# EAGLE board targetboard.job (EAGLE 6.5.0)
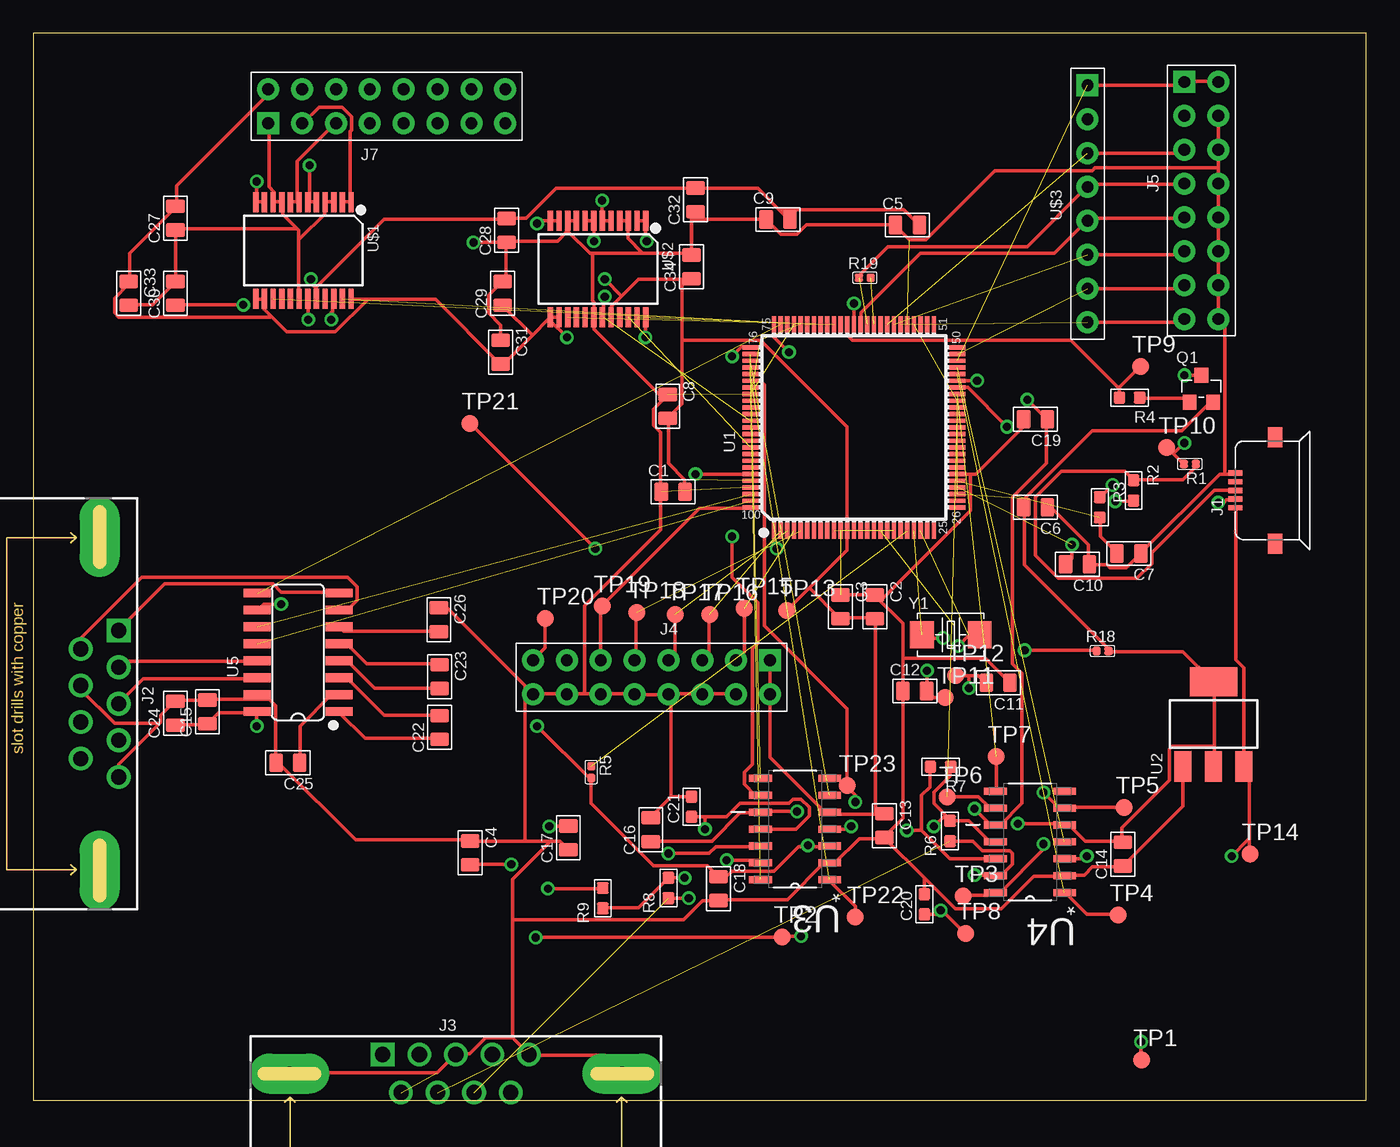
[diagram p0: board, top side]
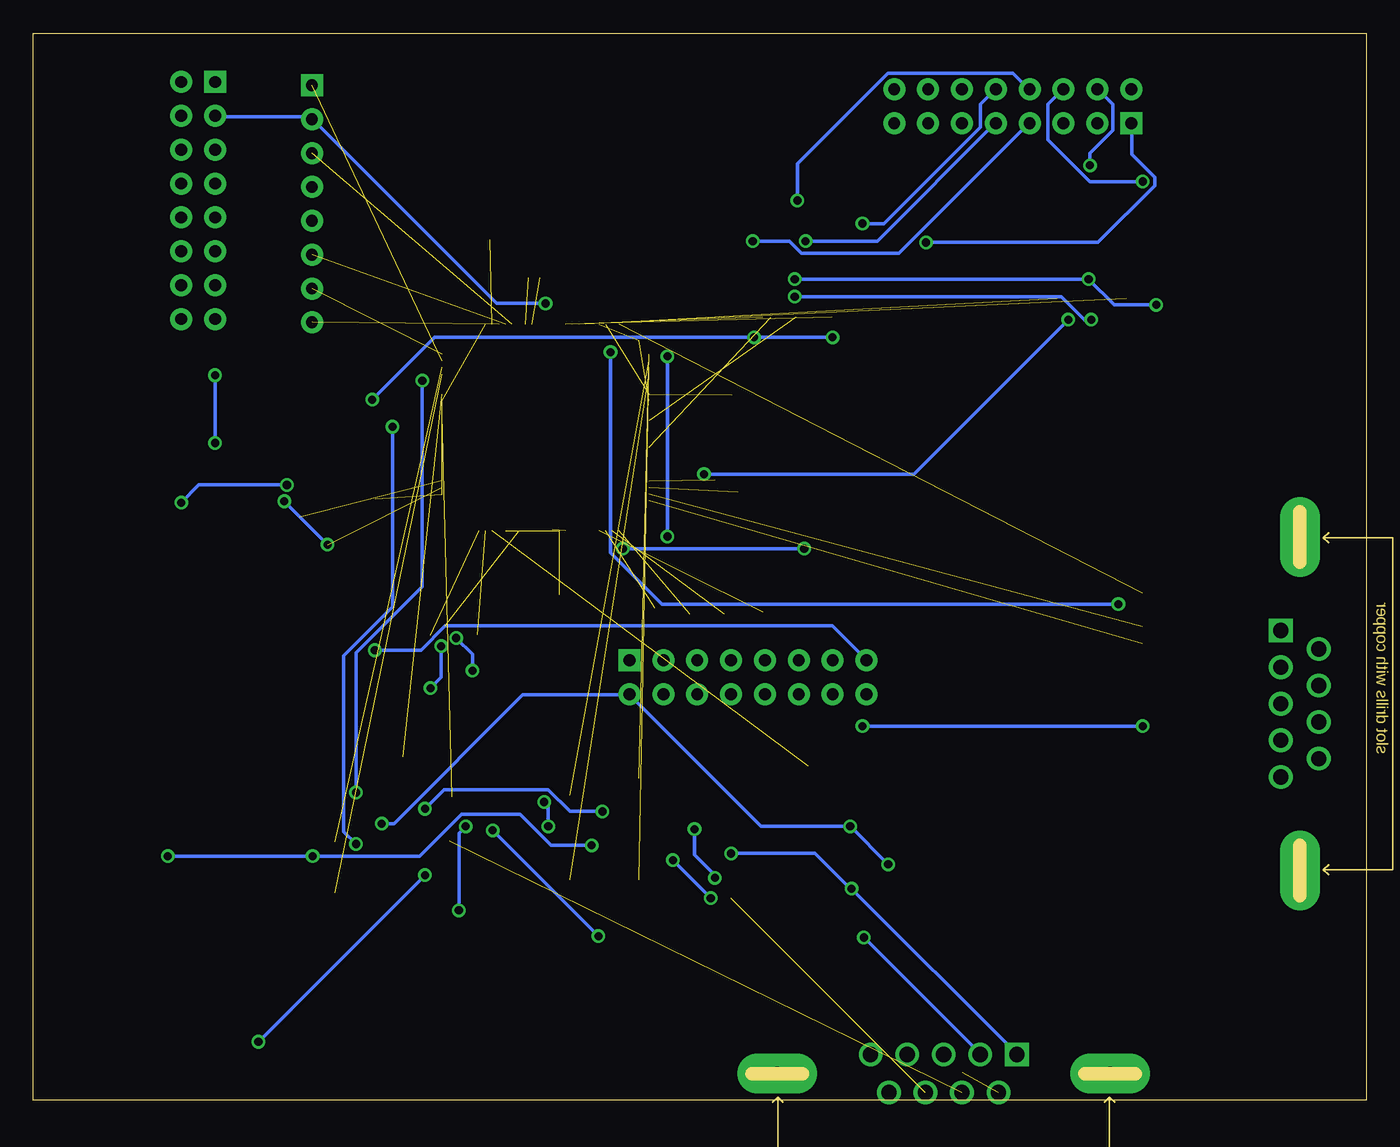
[diagram p1: board, bottom side, seen from below]

Size 100 x 80 mm. Coordinates in mm from the lower left corner, seen from the top.
Outline: 0,0 100,0 100,80 0,80 0,0
Copper layers (1*16): Top 0.035mm / dielectric 1.5mm / Bottom 0.035mm
Design rules "default": minimum track width 10mil, minimum drill 24mil, track to track 8mil, track to pad 8mil, pad to pad 8mil, via to via 8mil, smd to smd 8mil, copper to edge 40mil, drill to drill 8mil, minimum pad ring 10mil, minimum via ring 8mil, stop-mask expansion 4mil, vias tented up to drill 0mil, thermal gap 10mil

## Footprints (pad centres in the part's own frame; a part is rotated, then mirrored left to right if it is on the bottom)
C0805 = smd 1.397 x 1.016: 1 0,0.889; 2 0,-0.889
C0603 = smd 0.889 x 0.889: 1 0,0.762; 2 0,-0.762
MICRO-USB5+2P-SMD-0.65 = smd 0.4 x 1.05: 1 -1.3,0; 2 -0.65,0; 3 0,0; 4 0.65,0; 5 1.3,0 | smd 1.5 x 1.1: 6 4,-3; 7 -4,-3
DSUB9+2P-2.77-90D-MALE = drill 1.143 pad 1.778 square: 1 -5.486,1.422 | drill 1.143 pad 1.778: 2 -2.743,1.422; 3 0,1.422; 4 2.743,1.422; 5 5.486,1.422; 6 -4.115,-1.422; 7 -1.372,-1.422; 8 1.372,-1.422; 9 4.115,-1.422 | drill 1 pad 3 long: G1 12.497,0; G2 -12.497,0
H2X8-2.54 = drill 0.889 pad 1.651 square: 1 -1.27,8.89 | drill 0.889 pad 1.651: 2 -1.27,6.35; 3 -1.27,3.81; 4 -1.27,1.27; 5 -1.27,-1.27; 6 -1.27,-3.81; 7 -1.27,-6.35; 8 -1.27,-8.89; 9 1.27,-8.89; 10 1.27,-6.35; 11 1.27,-3.81; 12 1.27,-1.27; 13 1.27,1.27; 14 1.27,3.81; 15 1.27,6.35; 16 1.27,8.89
SOT-23 = smd 1.016 x 1.143: 1 -0.889,-1.016; 2 0.889,-1.016; 3 0,1.016
R0402 = smd 0.635 x 0.635: 1 0,0.445; 2 0,-0.445
R0603 = smd 0.889 x 0.889: 1 0,0.762; 2 0,-0.762
B1,27 = smd 1.27 x 1.27: TP 0,0
LQFP100-0.5-13.8X13.8MM = smd 1.2 x 0.32: 1 -7.75,6; 2 -7.75,5.5; 3 -7.75,5; 4 -7.75,4.5; 5 -7.75,4; 6 -7.75,3.5; 7 -7.75,3; 8 -7.75,2.5; 9 -7.75,2; 10 -7.75,1.5; 11 -7.75,1; 12 -7.75,0.5; 13 -7.75,0; 14 -7.75,-0.5; 15 -7.75,-1; 16 -7.75,-1.5; 17 -7.75,-2; 18 -7.75,-2.5; 19 -7.75,-3; 20 -7.75,-3.5; 21 -7.75,-4; 22 -7.75,-4.5; 23 -7.75,-5; 24 -7.75,-5.5; 25 -7.75,-6; 51 7.75,-6; 52 7.75,-5.5; 53 7.75,-5; 54 7.75,-4.5; 55 7.75,-4; 56 7.75,-3.5; 57 7.75,-3; 58 7.75,-2.5; 59 7.75,-2; 60 7.75,-1.5; 61 7.75,-1; 62 7.75,-0.5; 63 7.75,0; 64 7.75,0.5; 65 7.75,1; 66 7.75,1.5; 67 7.75,2; 68 7.75,2.5; 69 7.75,3; 70 7.75,3.5; 71 7.75,4; 72 7.75,4.5; 73 7.75,5; 74 7.75,5.5; 75 7.75,6 | smd 0.32 x 1.2: 26 -6,-7.75; 27 -5.5,-7.75; 28 -5,-7.75; 29 -4.5,-7.75; 30 -4,-7.75; 31 -3.5,-7.75; 32 -3,-7.75; 33 -2.5,-7.75; 34 -2,-7.75; 35 -1.5,-7.75; 36 -1,-7.75; 37 -0.5,-7.75; 38 0,-7.75; 39 0.5,-7.75; 40 1,-7.75; 41 1.5,-7.75; 42 2,-7.75; 43 2.5,-7.75; 44 3,-7.75; 45 3.5,-7.75; 46 4,-7.75; 47 4.5,-7.75; 48 5,-7.75; 49 5.5,-7.75; 50 6,-7.75; 76 6,7.75; 77 5.5,7.75; 78 5,7.75; 79 4.5,7.75; 80 4,7.75; 81 3.5,7.75; 82 3,7.75; 83 2.5,7.75; 84 2,7.75; 85 1.5,7.75; 86 1,7.75; 87 0.5,7.75; 88 0,7.75; 89 -0.5,7.75; 90 -1,7.75; 91 -1.5,7.75; 92 -2,7.75; 93 -2.5,7.75; 94 -3,7.75; 95 -3.5,7.75; 96 -4,7.75; 97 -4.5,7.75; 98 -5,7.75; 99 -5.5,7.75; 100 -6,7.75
SOT-223 = smd 1.27 x 2.286: 1 -2.286,-3.175; 2 0,-3.175; 3 2.286,-3.175 | smd 3.556 x 2.159: TER 0,3.175
SOIC127P600X175-14N = smd 1.702 x 0.533: 1 -2.591,3.81; 2 -2.591,2.54; 3 -2.591,1.27; 4 -2.591,0; 5 -2.591,-1.27; 6 -2.591,-2.54; 7 -2.591,-3.81; 8 2.591,-3.81; 9 2.591,-2.54; 10 2.591,-1.27; 11 2.591,0; 12 2.591,1.27; 13 2.591,2.54; 14 2.591,3.81
SOIC16-1.27-10X3.9MM = smd 0.66 x 2.032: 1 -4.445,-3.073; 2 -3.175,-3.073; 3 -1.905,-3.073; 4 -0.635,-3.073; 5 0.635,-3.073; 6 1.905,-3.073; 7 3.175,-3.073; 8 4.445,-3.073; 9 4.445,3.073; 10 3.175,3.073; 11 1.905,3.073; 12 0.635,3.073; 13 -0.635,3.073; 14 -1.905,3.073; 15 -3.175,3.073; 16 -4.445,3.073
SSOP24-0.65-8.9X5.3MM = smd 0.4 x 1.5: 1 -3.575,-3.625; 2 -2.925,-3.625; 3 -2.275,-3.625; 4 -1.625,-3.625; 5 -0.975,-3.625; 6 -0.325,-3.625; 7 0.325,-3.625; 8 0.975,-3.625; 9 1.625,-3.625; 10 2.275,-3.625; 11 2.925,-3.625; 12 3.575,-3.625; 13 3.575,3.625; 14 2.925,3.625; 15 2.275,3.625; 16 1.625,3.625; 17 0.975,3.625; 18 0.325,3.625; 19 -0.325,3.625; 20 -0.975,3.625; 21 -1.625,3.625; 22 -2.275,3.625; 23 -2.925,3.625; 24 -3.575,3.625
H8-2.54 = drill 0.889 pad 1.651 square: 1 0,8.89 | drill 0.889 pad 1.651: 2 0,6.35; 3 0,3.81; 4 0,1.27; 5 0,-1.27; 6 0,-3.81; 7 0,-6.35; 8 0,-8.89
X2-SMD-5.0X3.2X1.3MM = smd 1.778 x 2.032: 1 -2.159,0; 2 2.159,0

## Placement (x,y rotation side)
C1  100nf  [C0805]  48.01,45.62 90 top
C2  100nf  [C0805]  63.14,36.98 0 top
C3  100nf  [C0805]  60.55,36.98 0 top
C4  100nf  [C0805]  32.77,18.54 0 top
C5  100nf  [C0805]  65.58,65.63 90 top
C6  100nf  [C0805]  75.18,44.45 270 top
C7  18pf  [C0805]  82.19,41 270 top
C8  100nf  [C0805]  47.6,52.02 0 top
C9  100nf  [C0805]  55.88,66.04 90 top
C10  18pf  [C0805]  78.33,40.18 270 top
C11  18pf  [C0805]  72.39,31.29 270 top
C12  18pf  [C0805]  66.14,30.68 90 top
C13  100nf  [C0805]  63.86,20.57 0 top
C14  100nf  [C0805]  81.74,18.44 180 top
C15  100nf  [C0805]  13.06,29.11 180 top
C16  100nf  [C0805]  46.33,20.27 180 top
C17  100nf  [C0805]  40.13,19.66 180 top
C18  100nf  [C0805]  51.41,15.85 0 top
C19  100nf  [C0805]  75.18,51.05 270 top
C20  22nf  [C0603]  66.85,14.68 180 top
C21  22nf  [C0603]  49.38,22 180 top
C22  1uf  [C0805]  30.48,27.94 180 top
C23  1uf  [C0805]  30.48,31.75 0 top
C24  1uf  [C0805]  10.67,29.01 180 top
C25  1uf  [C0805]  19.1,25.3 270 top
C26  1uf  [C0805]  30.43,36.02 0 top
C27  10uf  [C0805]  10.67,66.14 180 top
C28  10uf  [C0805]  35.51,65.23 180 top
C29  100nf  [C0805]  35.2,60.5 180 top
C30  100nf  [C0805]  10.67,60.5 180 top
C31  10uf  [C0805]  35.05,56.08 0 top
C32  10uf  [C0805]  49.68,67.51 180 top
C33  100nf  [C0805]  7.16,60.5 0 top
C34  100nf  [C0805]  49.38,62.48 180 top
J1  [MICRO-USB5+2P-SMD-0.65]  90.17,45.72 90 top
J2  [DSUB9+2P-2.77-90D-MALE]  4.98,29.72 270 top
J3  [DSUB9+2P-2.77-90D-MALE]  31.7,1.98 0 top
J4  2x8p-2.54  [H2X8-2.54]  46.38,31.7 270 top
J5  2x8p-2.54  [H2X8-2.54]  87.63,67.46 0 top
J7  2x8p-2.54  [H2X8-2.54]  26.52,74.52 90 top
Q1  [SOT-23]  87.63,53.34 0 top
R1  1.5K  [R0402]  86.77,47.7 270 top
R2  33.2R  [R0603]  82.55,45.72 180 top
R3  33.2R  [R0603]  80.01,44.45 180 top
R4  51R  [R0603]  82.25,52.68 90 top
R5  1.5K  [R0402]  41.86,24.59 0 top
R6  56.2R  [R0603]  68.78,20.17 0 top
R7  56.2R  [R0603]  68.07,24.99 90 top
R8  56.2R  [R0603]  47.65,15.9 0 top
R9  56.2R  [R0603]  42.72,15.14 0 top
R18  1.5K  [R0402]  80.21,33.68 90 top
R19  1.5K  [R0402]  62.38,61.67 90 top
TP1  TPB1,27  [B1,27]  83.16,3 0 top
TP2  TPB1,27  [B1,27]  56.18,12.24 0 top
TP3  TPB1,27  [B1,27]  69.75,15.29 0 top
TP4  TPB1,27  [B1,27]  81.38,13.87 0 top
TP5  TPB1,27  [B1,27]  81.84,21.95 0 top
TP6  TPB1,27  [B1,27]  68.58,22.71 0 top
TP7  TPB1,27  [B1,27]  72.24,25.76 0 top
TP8  TPB1,27  [B1,27]  69.95,12.5 0 top
TP9  TPB1,27  [B1,27]  83.06,55.02 0 top
TP10  TPB1,27  [B1,27]  85.04,48.92 0 top
TP11  TPB1,27  [B1,27]  68.43,30.18 0 top
TP12  TPB1,27  [B1,27]  69.19,31.85 0 top
TP13  TPB1,27  [B1,27]  56.54,36.73 0 top
TP14  TPB1,27  [B1,27]  91.29,18.44 0 top
TP15  TPB1,27  [B1,27]  53.34,36.88 0 top
TP16  TPB1,27  [B1,27]  50.75,36.42 0 top
TP17  TPB1,27  [B1,27]  48.16,36.42 0 top
TP18  TPB1,27  [B1,27]  45.26,36.58 0 top
TP19  TPB1,27  [B1,27]  42.67,37.03 0 top
TP20  TPB1,27  [B1,27]  38.4,36.12 0 top
TP21  TPB1,27  [B1,27]  32.77,50.75 0 top
TP22  TPB1,27  [B1,27]  61.67,13.72 0 top
TP23  TPB1,27  [B1,27]  61.06,23.57 0 top
U1  [LQFP100-0.5-13.8X13.8MM]  61.57,50.44 90 top
U2  PMIC-CJT1117-3.3(SOT223)  [SOT-223]  88.54,28.19 0 top
U3  TJA1041AT  [SOIC127P600X175-14N]  57.15,20.32 180 top
U4  TJA1041AT  [SOIC127P600X175-14N]  74.78,19.35 180 top
U5  [SOIC16-1.27-10X3.9MM]  19.86,33.58 90 top
U$1  [SSOP24-0.65-8.9X5.3MM]  20.27,63.7 180 top
U$2  [SSOP24-0.65-8.9X5.3MM]  42.37,62.33 180 top
U$3  DIP-BLACK-MALE-HEADER-VERT(8P-2.54)  [H8-2.54]  79.1,67.21 0 top
Y1  12MHZ  [X2-SMD-5.0X3.2X1.3MM]  68.83,34.9 0 top

## Library data of the parts
C1-C6 C8 C9 C13-C19 C29 C30 C33 C34 = Seeed-OPL-Capacitor; MPN: CC0805KRX7R9BB104
C7 C10-C12 = Seeed-OPL-Capacitor
C20 C21 = Seeed-OPL-Capacitor; MPN: CC0603KRX7R9BB223
C22-C26 = Seeed-OPL-Capacitor; MPN: CC0805KKX7R8BB105
C27 C28 C31 C32 = Seeed-OPL-Capacitor; MPN: CC0805KKX5R8BB106
J1 = Seeed-OPL-Connector; MPN: ST-USB-001L
J2 J3 = Seeed-OPL-Connector
J4 J5 J7 = Seeed-OPL-Connector; MPN: P125-1216A0AS116A1
Q1 = Seeed-OPL-Transistor; MPN: S8550
R1 R5 R18 R19 = Seeed-OPL-Resistor; MPN: RC0402JR-071K5L
R2 R3 = Seeed-OPL-Resistor; MPN: RC0603FR-0733R2L
R4 = Seeed-OPL-Resistor; MPN: RC0603FR-0751RL
R6-R9 = Seeed-OPL-Resistor; MPN: RC0603FR-0756R2L
TP1-TP23 = testpad
U1 = Seeed-OPL-ic; MPN: LPC1768FBD100
U2 = Seeed-OPL-ic; MPN: CJT1117-3.3
U3 U4 = NXP_By_element14_Batch_1; MPN: TJA1041AT; OC_FARNELL: 1727708; OC_NEWARK: 26R3027; PACKAGE: SOIC-14; SUPPLIER: NXP
U5 = Seeed-OPL-ic; MPN: MAX232D
U$1 U$2 = Seeed-OPL-ic; MPN: TB6612FNG-O/C8/EL
U$3 = Seeed-OPL-Connector; MPN: P125-1108A1BS116A1
Y1 = Seeed-OPL-crystal-osctllator; MPN: 5032/2P

## Nets
+12V: C16.1 C19.1 C27.2 C29.1 C31.2 C33.1 J7.16 U3.10 U4.10 U$1.13 U$1.14 U$1.24 U$2.13 U$2.14 U$2.24
CAN1_EN: TP5.TP U1.45 U4.6
CAN1_ERR: TP7.TP U1.43 U4.8
CAN1_H: J3.7 R6.2 TP1.TP U4.13
CAN1_L: J3.2 R7.1 TP2.TP U4.12
CAN1_RX: U1.47 U4.4
CAN1_STB: TP3.TP U1.44 U4.14
CAN1_TX: TP4.TP U1.46 U4.1
CAN1_WAKE: TP6.TP U1.40 U4.9
CAN2_EN: U1.78 U3.6
CAN2_ERR: U1.77 U3.8
CAN2_H: J3.8 R8.2 U3.13
CAN2_L: J3.1 R9.1 U3.12
CAN2_RX: TP23.TP U1.81 U3.4
CAN2_STB: U1.79 U3.14
CAN2_TX: TP22.TP U1.80 U3.1
CAN2_WAKE: U1.76 U3.9
CM1A: U1.95 U$1.22
CM1B: U1.94
CM2A: U1.93
CM2B: U1.92
CM3A: U1.91 U$2.22
CM3B: U1.90
CM4A: U1.89
CM4B: U1.88
GND: C1.1 C2.1 C3.1 C4.1 C5.1 C6.1 C7.1 C8.1 C9.1 C10.1 C11.1 C12.1 C13.2 C14.1 C15.2 C16.2 C17.1 C18.2 C19.2 C20.2 C21.2 C24.2 C25.2 C26.1 C27.1 C28.1 C29.2 C30.2 C31.1 C32.1 C33.2 C34.2 J1.5 J2.5 J2.7 J3.3 J3.5 J3.6 J3.G1 J3.G2 J4.9 J4.10 J4.11 J4.12 J4.13 J4.14 J4.15 J5.9 J5.10 J5.11 J5.12 J5.13 J5.14 J5.15 J7.1 U1.11 U1.15 U1.31 U1.41 U1.55 U1.72 U1.83 U1.97 U2.1 U3.2 U4.2 U5.15 U$1.3 U$1.4 U$1.9 U$1.10 U$1.18 U$2.3 U$2.4 U$2.9 U$2.10 U$2.18
M1A: J7.2 U$1.1 U$1.2
M1B: J7.15 U$1.5 U$1.6
M2A: J7.3 U$1.7 U$1.8
M2B: J7.14 U$1.11 U$1.12
M3A: J7.4 U$2.1 U$2.2
M3B: J7.13 U$2.5 U$2.6
M4A: J7.5 U$2.7 U$2.8
M4B: J7.12 U$2.11 U$2.12
N$1: J5.1 J5.16 U1.48 U$3.1
N$2: C10.2 R2.1 U1.29
N$3: C7.2 R3.1 U1.30
N$4: J1.2 R3.2
N$5: J1.3 R1.1 R2.2
N$6: C12.2 TP11.TP U1.22 Y1.1
N$7: Q1.3 R1.2 TP10.TP
N$8: C11.2 TP12.TP U1.23 Y1.2
N$9: Q1.1 R4.2
N$10: R5.1 U1.21
N$11: C20.1 R6.1 R7.2 TP8.TP U4.11
N$12: U1.98 U5.11
N$13: U1.99 U5.12
N$14: C21.1 R8.1 R9.2 U3.11
N$15: C23.2 U5.4
N$16: C23.1 U5.5
N$17: C22.1 U5.1
N$18: C22.2 U5.3
N$19: C26.2 U5.6
N$20: C25.1 U5.2
N$22: R19.2 U1.60
N$28: J7.11
N$29: J7.10
N$30: J7.9
N$31: J7.8
N$32: J7.7
N$33: J7.6
NTRST: J4.2 TP15.TP U1.4
P2_9: R4.1 TP9.TP U1.64
PWM1: U1.69 U$1.23
PWM2: U1.68 U$1.15
PWM3: U1.67 U$2.23
PWM4: U1.66 U$2.15
RST: J4.8 R18.1 TP20.TP U1.17
RTCK: J4.6 TP19.TP U1.100
RXD1: U1.74 U5.9
SER1_RX: J2.2 U5.13
SER1_TX: J2.3 U5.14
SER2_RX: J2.1 U5.8
SER2_TX: J2.6 U5.7
STBY: U1.87 U$1.19 U$2.19
T_RST: U1.59
T_RTCK: J5.6 U1.57 U$3.6
T_SRST: J5.8 U1.56 U$3.8
T_SWDCLK: J5.5 U1.62 U$3.5
T_SWDIO: J5.4 R19.1 U1.61 U$3.4
T_SWO: J5.7 U1.49 U$3.7
T_TDI: J5.3 U1.58 U$3.3
T_TRST: J5.2 U1.63 U$3.2
TCK: J4.5 TP18.TP U1.5
TDI: J4.3 TP16.TP U1.2
TDO: TP21.TP U1.1
TMS: J4.4 TP17.TP U1.3
TXD1: U1.75 U5.10
VCC: C15.1 C18.1 C24.1 J1.1 R5.2 TP14.TP U2.3 U3.3 U4.3 U5.16
VDD: C1.2 C2.2 C3.2 C4.2 C5.2 C6.2 C8.2 C9.2 C13.1 C14.2 C17.2 C28.2 C30.1 C32.2 C34.1 J4.1 J4.16 Q1.2 R18.2 TP13.TP U1.10 U1.12 U1.19 U1.28 U1.42 U1.54 U1.71 U1.84 U1.96 U2.2 U2.TER U3.5 U4.5 U$1.20 U$2.20

## Tracks (layer width: path | path; a pad name or v marks a point on that pad's centre or on a via)
+12V  (via drill 0.61)
  Top 0.254: J7.16 17.58,75.79 17.58,75.39 10.77,68.58 10.77,67.06 C27.2 10.67,66.95 7.21,63.5 7.21,61.47 C33.1 7.11,61.37 7.11,61.16 6.1,60.15 6.1,59.03 6.4,58.73 17.78,58.73 17.83,58.78 | U$1.13 16.76,60.05 17.27,60.05 U$1.14 17.27,59.94 17.27,59.33 17.83,58.78 | 37.44,57.35 38.71,58.62 U$2.13 | 37.44,57.35 35.36,55.27 35.05,55.27 C31.2 34.95,55.27 30.18,60.05 24.99,60.05 | 37.44,57.35 35.26,59.54 C29.1 | U$2.14 39.42,58.73 38.91,58.73 U$2.13 | v45.92,57.2 45.92,58.62 U$2.24 | v40.03,57.2 38.71,58.52 U$2.13 | 24.99,60.05 23.88,60.05 U$1.24 | 17.83,58.78 19,57.61 22.66,57.61 24.99,59.94 24.99,60.05 | C16.1 46.33,19.41 50.9,19.41 53.03,21.54 54.56,21.54 U3.10 54.66,21.64 v57.3,21.64 | v70.61,21.84 71.73,20.73 72.14,20.73 U4.10 72.54,20.62 74.17,22.25 74.17,32 73.46,32.72 73.46,45.21 76,47.75 76,51 C19.1 76,51.1 v74.57,52.53
  Bottom 0.254: v40.03,57.2 v45.92,57.2 69.9,57.2 v74.57,52.53 | v57.3,21.64 59.74,21.64 61.37,23.27 69.19,23.27 v70.61,21.84
CAN1_EN  (via drill 0.61)
  Top 0.254: v70.81,53.95 69.39,53.95 U1.45 | v75.79,23.06 76.91,21.95 77.32,21.95 U4.6 77.42,21.95 TP5.TP
  Bottom 0.254: v70.81,53.95 70.81,38.51 75.79,33.53 v75.79,23.06
CAN1_ERR  (1 unrouted)
  Top 0.254: TP7.TP 72.24,23.16 U4.8
CAN1_H  (via drill 0.61)  (1 unrouted)
  Top 0.254: R6.2 70.51,19.41 71.22,18.69 73.25,18.69 73.46,18.49 73.46,17.68 72.64,16.87 72.24,16.87 U4.13 72.14,16.87 v70.61,16.87 | v83.11,4.37 83.11,3.05 TP1.TP
  Bottom 0.254: v70.61,16.87 v83.11,4.37
CAN1_L  (via drill 0.61)
  Top 0.254: 66.65,20.22 66.65,22.86 67.26,23.47 67.26,24.99 R7.1 | 66.65,20.22 68.78,18.09 U4.12 | v37.69,12.19 56.19,12.19 TP2.TP 56.29,12.29 v57.61,12.29 | v65.53,20.22 66.65,20.22
  Bottom 0.254: v37.69,12.19 28.96,3.45 J3.2 | v57.61,12.29 v65.53,20.22
CAN1_RX  (1 unrouted)
CAN1_STB  (via drill 0.61)
  Top 0.254: v73.05,50.49 70.1,53.44 69.39,53.44 U1.44 | v75.79,19.2 75.79,18.8 72.54,15.54 U4.14 72.14,15.44 72.03,15.34 69.8,15.34 TP3.TP
  Bottom 0.254: v73.05,50.49 73.05,36.98 76.71,33.33 76.71,20.12 v75.79,19.2
CAN1_TX  (1 unrouted)
  Top 0.254: TP4.TP 81.38,13.92 79.05,13.92 77.42,15.54 U4.1
CAN1_WAKE  (1 unrouted)
  Top 0.254: TP6.TP 68.58,22.76 70.92,22.76 71.73,21.95 72.14,21.95 U4.9
CAN2_EN  (1 unrouted)
CAN2_ERR  (1 unrouted)
CAN2_H  (via drill 0.61)  (1 unrouted)
  Top 0.254: v49.17,15.14 R8.2 | v52.02,17.98 54.36,17.98 U3.13
  Bottom 0.254: v52.02,17.98 v49.17,15.14
CAN2_L  (via drill 0.61)
  Top 0.254: v38.61,15.85 42.67,15.85 R9.1 | v47.65,18.49 50.7,18.49 51.21,19 54.56,19 U3.12
  Bottom 0.254: J3.1 26.21,3.45 v38.61,15.85 38.71,15.85 41.35,18.49 v47.65,18.49
CAN2_RX  (via drill 0.61)
  Top 0.254: U1.81 53.85,53.95 54.56,53.95 54.86,53.65 54.86,35.56 61.06,29.36 TP23.TP 61.06,23.47 61.67,22.86 v61.67,22.35 | U3.4 61.16,20.32 v61.37,20.52
  Bottom 0.254: v61.37,20.52 61.37,22.05 v61.67,22.35
CAN2_STB  (1 unrouted)
CAN2_TX  (1 unrouted)
  Top 0.254: TP22.TP 61.67,14.53 59.74,16.46 U3.1
CAN2_WAKE  (via drill 0.61)
  Top 0.254: v52.43,55.78 53.14,56.49 53.75,56.49 U1.76 | v52.43,42.27 52.43,39.22 54.36,37.29 54.36,34.24 53.95,33.83 53.95,25.2 53.34,24.59 53.34,23.67 54.15,22.86 U3.9
  Bottom 0.254: v52.43,42.27 v52.43,55.78
CM1A  (via drill 0.61)
  Top 0.254: v49.68,46.94 53.75,46.94 U1.95 | v22.35,58.52 22.35,59.03 22.45,59.13 22.45,60.05 U$1.22
  Bottom 0.254: v49.68,46.94 33.93,46.94 v22.35,58.52
CM3A  (1 unrouted)
GND  (via drill 0.61)  (8 unrouted)
  Top 0.254: 89.41,46.94 89,46.94 83.11,41.05 C7.1 83.01,40.95 81.99,39.93 80.77,39.93 80.57,40.13 79.25,40.13 C10.1 79.15,40.23 79.15,41.66 76.4,44.4 76.1,44.4 C6.1 | 89.41,46.94 90.12,46.94 J1.5 | 88.9,69.9 J5.14 J5.15 | 88.9,69.9 J5.13 J5.12 J5.11 J5.10 J5.9 89,58.52 89.41,58.12 89.41,46.94 | C33.2 7.21,59.64 8.94,59.64 10.67,61.37 C30.2 C27.1 10.77,65.33 19.71,65.33 19.76,65.38 | U$1.3 22.45,67.36 21.95,67.36 U$1.4 21.84,67.26 21.84,66.45 20.02,64.62 19.91,64.62 | 19.91,64.62 19.91,65.23 19.76,65.38 | 19.91,64.62 19.91,60.15 U$1.18 | 19.76,65.38 18.69,66.45 18.69,67.26 U$1.9 18.59,67.36 18.09,67.36 U$1.10 18.09,67.46 18.09,68.07 17.68,68.48 17.68,73.25 J7.1 | U$2.9 40.74,65.94 40.13,65.94 U$2.10 40.13,65.84 40.13,65.23 | C31.1 35.05,58.12 34.14,59.03 34.14,60.35 35.15,61.37 C29.2 35.26,61.47 35.46,61.67 35.46,64.31 C28.1 | 40.13,65.23 39.32,64.41 35.56,64.41 C28.1 | U$2.4 43.99,65.94 44.6,65.94 U$2.3 44.6,65.84 44.6,64.62 45.67,63.55 | 49.38,66.04 49.38,66.24 49.68,66.55 C32.1 | 49.38,66.04 C34.2 49.28,63.5 45.72,63.5 45.67,63.55 | 49.38,66.04 C9.1 55.07,65.94 56.08,64.92 57.3,64.92 58.01,65.63 C5.1 64.72,65.53 65.73,64.52 66.95,64.52 72.14,69.7 79.45,69.7 79.65,69.9 88.9,69.9 | 41.96,63.5 45.62,63.5 45.67,63.55 | 41.96,63.5 41.76,63.5 40.13,65.13 40.13,65.23 | 41.96,63.5 41.96,59.94 42.06,59.84 42.06,58.83 U$2.18 42.06,58.62 42.06,57.81 47.24,52.63 C8.1 47.55,52.83 46.53,51.82 46.53,50.6 47.04,50.09 47.04,45.62 C1.1 47.04,45.52 47.04,42.77 41.35,37.08 41.35,30.48 | v33.02,64.31 35.36,64.31 C28.1 | 70.31,46.94 70.71,46.94 74.27,50.49 74.27,51 C19.2
  Top 0.254: 70.31,46.94 69.39,46.94 U1.31 | C3.1 60.55,37.9 63.09,37.9 C2.1 | 65.23,33.12 65.23,35.76 63.2,37.8 C2.1 | 65.23,33.12 65.23,30.68 C12.1 65.23,30.58 65.23,21.13 63.8,19.71 C13.2 | 65.23,33.12 71.42,33.12 73.25,31.29 C11.1 | 70.31,46.94 70.31,44.2 63.6,37.49 C2.1 | U2.1 86.26,22.05 81.79,17.58 C14.1 81.69,17.48 79.45,17.48 78.84,16.87 77.42,16.87 U4.2 77.32,16.76 75.08,16.76 72.64,14.33 69.19,14.33 66.95,16.56 66.85,16.56 | 66.85,16.56 66.85,16.66 63.91,19.61 C13.2 | 66.85,16.56 C20.2 | C13.2 63.8,19.61 61.98,19.61 60.15,17.78 U3.2 59.33,17.78 56.59,15.04 51.41,15.04 C18.2 51.31,14.94 50.19,14.94 48.77,13.51 35.97,13.51 | 35.97,4.67 33.93,4.67 32.72,3.45 31.7,3.45 J3.3 31.6,3.35 30.28,2.03 19.2,2.03 J3.G2 | 35.97,4.67 37.19,3.45 J3.5 37.29,3.35 42.88,3.35 44.2,2.03 J3.G1 | 17.63,30.12 17.37,30.38 16.87,30.38 U5.15 | 17.63,30.12 18.19,29.57 18.19,25.3 C25.2 18.29,25.2 18.49,25.2 24.18,19.51 32.72,19.51 C4.1 32.82,19.41 36.88,19.41 | 17.63,30.12 17.58,30.07 13.11,30.07 C15.2 13.01,29.97 10.67,29.97 C24.2 10.57,29.87 9.55,28.85 9.55,28.35 9.4,28.19 | J2.5 6.4,25.2 9.4,28.19 | J2.7 3.56,30.79 6.1,28.25 9.35,28.25 9.4,28.19 | 47.85,22.76 C21.2 | 47.85,22.76 46.33,21.23 C16.2 | 47.85,22.76 47.85,30.18 47.65,30.38 J4.13 | J4.13 47.75,30.48 50.19,30.48 J4.14 50.29,30.48 52.73,30.48 J4.15 | 38.71,19.41 39.52,19.41 40.13,18.8 C17.1 | 38.71,19.41 36.88,19.41 | 36.93,31.04 37.49,30.48 J4.9 37.59,30.48 40.03,30.48 J4.10 40.13,30.48 41.35,30.48 | 36.93,31.04 31.09,36.88 30.48,36.88 C26.1 | 41.35,30.48 42.57,30.48 J4.11 42.67,30.48 45.11,30.48 J4.12 45.21,30.38 47.55,30.38 J4.13
  Top 0.254: 36.88,19.41 36.88,30.99 36.93,31.04 | 35.97,13.51 35.97,16.56 38.71,19.3 38.71,19.41 | 35.97,13.51 35.97,4.67
  Bottom 0.254: v33.02,64.31 20.12,64.31 15.85,68.58 15.85,69.19 17.58,70.92 17.58,73.25 J7.1
M1A
  Top 0.254: U$1.2 23.27,67.36 23.77,67.36 U$1.1 23.77,67.46 23.77,72.64 23.88,72.75 23.88,73.76 23.16,74.47 21.44,74.47 20.22,73.25 J7.2
M1B  (via drill 0.61)
  Top 0.254: U$1.5 21.23,67.36 20.62,67.36 U$1.6 20.73,67.46 v20.73,70.1
  Bottom 0.254: v20.73,70.1 20.73,71.02 19,72.75 19,74.68 20.12,75.79 J7.15
M2A
  Top 0.254: U$1.8 19.3,67.36 19.91,67.36 U$1.7 19.81,67.46 19.81,70.41 22.66,73.25 J7.3
M2B  (via drill 0.61)
  Top 0.254: U$1.11 17.27,67.36 16.76,67.36 U$1.12 16.76,67.46 v16.76,68.89
  Bottom 0.254: v16.76,68.89 20.73,68.89 23.88,72.03 23.88,74.68 22.76,75.79 J7.14
M3A  (via drill 0.61)
  Top 0.254: U$2.2 45.31,65.94 45.92,65.94 U$2.1 45.92,65.84 45.92,64.52 v46.02,64.41
  Bottom 0.254: v46.02,64.41 43.28,64.41 42.37,63.5 35.05,63.5 25.3,73.25 J7.4
M3B  (via drill 0.61)
  Top 0.254: U$2.5 43.28,65.94 42.77,65.94 U$2.6 42.67,66.04 v42.67,67.46
  Bottom 0.254: v42.67,67.46 42.67,70.21 35.87,77.01 26.52,77.01 25.3,75.79 J7.13
M4A  (via drill 0.61)
  Top 0.254: U$2.8 41.45,65.94 41.96,65.94 U$2.7 42.06,65.84 v42.06,64.41
  Bottom 0.254: v42.06,64.41 36.68,64.41 27.84,73.25 J7.5
M4B  (via drill 0.61)
  Top 0.254: U$2.11 39.42,65.94 38.81,65.94 U$2.12 38.71,65.94 38,65.94 v37.8,65.73
  Bottom 0.254: v37.8,65.73 36.17,65.73 28.96,72.95 28.96,74.68 27.84,75.79 J7.12
N$1  (1 unrouted)
  Top 0.254: U$3.1 86.16,76.1 86.36,76.3 J5.1 86.46,76.4 88.9,76.4 J5.16
N$2  (via drill 0.61)  (1 unrouted)
  Top 0.254: v81.18,44.91 82.5,44.91 R2.1 | v77.93,41.66 77.93,40.64 77.52,40.23 C10.2
  Bottom 0.254: v77.93,41.66 v81.18,44.91
N$3  (1 unrouted)
  Top 0.254: R3.1 80.06,43.69 80.06,42.27 81.28,41.05 C7.2
N$4  (via drill 0.61)
  Top 0.254: v80.97,46.13 80.06,45.21 R3.2 | v88.9,44.81 89.31,44.81 89.51,45.01 90.12,45.01 J1.2
  Bottom 0.254: v80.97,46.13 87.58,46.13 v88.9,44.81
N$5
  Top 0.254: R1.1 87.17,47.65 87.17,47.45 86.26,46.53 82.6,46.53 R2.2 81.89,47.14 77.11,47.14 75.18,45.21 75.18,40.84 76.91,39.12 82.8,39.12 83.92,40.23 83.92,41.05 88.59,45.72 J1.3
N$6  (via drill 0.61)  (1 unrouted)
  Top 0.254: TP11.TP 67.56,30.18 67.06,30.68 C12.2 67.06,30.79 v67.06,32.21 | v68.28,34.65 66.95,34.65 66.75,34.85 Y1.1
  Bottom 0.254: v67.06,32.21 67.06,33.43 v68.28,34.65
N$7  (via drill 0.61)
  Top 0.254: 85.55,48.46 85.04,48.97 TP10.TP | 85.55,48.46 86.26,47.75 R1.2 | v86.36,54.36 Q1.3 | 85.55,48.46 v86.36,49.28
  Bottom 0.254: v86.36,49.28 v86.36,54.36
N$8  (via drill 0.61)  (1 unrouted)
  Top 0.254: 70.21,31.8 70.92,31.8 71.42,31.29 C11.2 | 70.21,31.8 69.19,31.8 TP12.TP | v69.39,34.04 70.21,34.85 70.92,34.85 Y1.2 | 70.21,31.8 v70.21,30.89
  Bottom 0.254: v69.39,34.04 69.39,31.7 v70.21,30.89
N$9
  Top 0.254: R4.2 83.01,52.63 86.36,52.63 86.67,52.32 Q1.1
N$10  (1 unrouted)
N$11  (via drill 0.61)
  Top 0.254: 68.07,13.92 68.48,13.92 69.9,12.5 TP8.TP | 68.07,13.92 C20.1 | R6.1 70.21,20.93 71.73,19.41 72.14,19.41 U4.11 | R7.2 68.78,24.99 68.78,24.28 67.56,23.06 67.56,22.25 68.78,21.03 R6.1 | v68.07,14.22 68.07,13.92 | v67.56,20.52 68.38,21.34 R6.1
  Bottom 0.254: v68.07,14.22 68.07,20.02 v67.56,20.52
N$12  (1 unrouted)
N$13  (1 unrouted)
N$14  (via drill 0.61)
  Top 0.254: R9.2 42.77,14.43 45.41,14.43 R8.1 v48.87,16.66 | 50.39,21.23 52.02,21.23 53.03,22.25 56.69,22.25 57,22.55 57.61,22.55 58.22,21.95 58.22,21.34 57.2,20.32 U3.11 | 50.39,21.23 C21.1 | 50.39,21.23 v50.39,20.32
  Bottom 0.254: v48.87,16.66 48.87,16.87 50.39,18.39 v50.39,20.32
N$15
  Top 0.254: C23.2 30.48,30.89 25.6,30.89 23.57,32.92 22.96,32.92 U5.4
N$16
  Top 0.254: C23.1 30.48,32.72 24.99,32.72 23.57,34.14 22.96,34.14 U5.5
N$17
  Top 0.254: C22.1 30.48,27.13 24.89,27.13 22.96,29.06 U5.1
N$18
  Top 0.254: C22.2 30.48,28.85 26.31,28.85 23.57,31.6 22.96,31.6 U5.3
N$19
  Top 0.254: U5.6 23.27,35.15 30.38,35.15 C26.2
N$20
  Top 0.254: C25.1 20.02,25.3 20.02,28.04 22.35,30.38 22.86,30.38 U5.2
N$22  (1 unrouted)
NTRST  (1 unrouted)
  Top 0.254: TP15.TP 53.34,33.63 52.73,33.02 J4.2
P2_9
  Top 0.254: 81.48,53.44 R4.1 | TP9.TP 81.48,53.44 | U1.64 61.06,58.12 61.06,57.4 61.47,57 77.83,57 81.38,53.44 81.48,53.44
PWM1  (1 unrouted)
PWM2  (1 unrouted)
PWM3  (1 unrouted)
PWM4  (1 unrouted)
RST  (via drill 0.61)  (1 unrouted)
  Top 0.254: v74.37,33.73 79.76,33.73 R18.1 | TP20.TP 38.41,33.93 37.49,33.02 J4.8
  Bottom 0.254: v74.37,33.73 70.92,33.73 69.09,35.56 40.03,35.56 37.49,33.02 J4.8
RTCK
  Top 0.254: U1.100 53.75,44.4 49.99,44.4 42.67,37.08 TP19.TP 42.57,36.98 J4.6
RXD1  (1 unrouted)
SER1_RX
  Top 0.254: U5.13 16.76,32.92 6.81,32.92 6.4,32.51 J2.2
SER1_TX
  Top 0.254: U5.14 16.76,31.6 8.23,31.6 6.4,29.77 J2.3
SER2_RX
  Top 0.254: U5.8 22.86,38.1 18.59,38.1 17.98,38.71 9.86,38.71 6.4,35.26 J2.1
SER2_TX
  Top 0.254: J2.6 3.56,34.65 8.13,39.22 23.57,39.22 24.28,38.51 24.28,37.49 23.57,36.78 22.96,36.78 U5.7
STBY  (via drill 0.61)  (1 unrouted)
  Top 0.254: v20.62,58.52 20.62,60.05 U$1.19 | v42.88,60.25 42.88,59.74 42.77,59.64 42.77,58.73 U$2.19
  Bottom 0.254: v20.62,58.52 21.13,58.52 22.86,60.25 v42.88,60.25
T_RTCK  (1 unrouted)
  Top 0.254: U$3.6 86.16,63.4 86.36,63.6 J5.6
T_SRST  (1 unrouted)
  Top 0.254: U$3.8 86.16,58.32 86.36,58.52 J5.8
T_SWDCLK
  Top 0.254: U1.62 62.08,58.22 62.08,59.03 66.55,63.5 76.61,63.5 79.05,65.94 U$3.5 79.15,66.04 79.25,66.14 86.36,66.14 J5.5
T_SWDIO  (1 unrouted)
  Top 0.254: R19.1 61.98,61.67 61.98,61.87 64.11,64.01 74.57,64.01 79.05,68.48 U$3.4 79.15,68.58 79.25,68.68 86.36,68.68 J5.4
T_SWO  (1 unrouted)
  Top 0.254: U$3.7 86.16,60.86 86.36,61.06 J5.7
T_TDI  (1 unrouted)
  Top 0.254: U$3.3 86.16,71.02 86.36,71.22 J5.3
T_TRST  (via drill 0.61)
  Top 0.254: v61.57,59.74 U1.63
  Bottom 0.254: v61.57,59.74 65.23,59.74 79.05,73.56 U$3.2 79.15,73.66 79.25,73.76 86.36,73.76 J5.2
TCK  (1 unrouted)
  Top 0.254: TP18.TP 45.21,36.58 45.21,33.12 45.11,33.02 J4.5
TDI  (1 unrouted)
  Top 0.254: TP16.TP 50.7,36.37 50.7,33.53 50.19,33.02 J4.3
TDO  (via drill 0.61)
  Top 0.254: v55.78,41.35 55.58,41.55 55.58,42.67 U1.1 | TP21.TP v42.16,41.35
  Bottom 0.254: v42.16,41.35 v55.78,41.35
TMS  (1 unrouted)
  Top 0.254: TP17.TP 48.16,33.53 47.65,33.02 J4.4
TXD1  (via drill 0.61)
  Top 0.254: v56.69,56.08 55.58,57.2 55.58,58.12 U1.75 | v18.59,37.19 17.27,37.19 16.87,36.78 U5.10
  Bottom 0.254: v56.69,56.08 56.69,41.05 52.83,37.19 v18.59,37.19
VCC  (via drill 0.61)
  Top 0.254: J1.1 90.22,44.4 90.22,33.02 90.83,32.41 U2.3 90.93,24.99 91.24,24.69 91.24,19.51 | 91.24,19.51 91.24,18.49 TP14.TP | U4.3 78.84,18.09 v79.05,18.29 | v89.92,18.29 91.14,19.51 91.24,19.51 | C24.1 10.67,28.14 13.01,28.14 C15.1 13.11,28.25 13.92,29.06 16.76,29.06 U5.16 16.76,28.96 v16.76,28.04 | 58.12,19 57.4,19 55.58,17.17 52.43,17.17 52.02,16.76 51.51,16.76 C18.1 51.41,16.76 50.6,17.58 46.53,17.58 41.86,22.25 R5.2 41.76,24.08 v37.8,28.04 | 58.12,19 59.74,19 U3.3 | v58.12,19.1 58.12,19
  Bottom 0.254: v89.92,18.29 v79.05,18.29 71.02,18.29 67.87,21.44 63.5,21.44 61.16,19.1 v58.12,19.1 | v37.8,28.04 v16.76,28.04
VDD  (via drill 0.61)  (8 unrouted)
  Top 0.254: v15.75,59.64 10.67,59.64 C30.1 | v20.83,61.57 20.83,61.27 21.18,60.91 | 21.18,60.91 21.23,60.86 21.23,60.15 U$1.20 | 56.03,66.7 54.36,68.38 49.78,68.38 C32.2 49.68,68.38 39.22,68.38 36.98,66.14 35.56,66.14 C28.2 35.46,66.04 26.31,66.04 21.18,60.91 | 56.03,66.7 56.69,66.04 C9.2 | C5.2 66.45,65.63 65.33,66.75 56.08,66.75 56.03,66.7 | Q1.2 88.29,52.32 86.16,50.19 79.45,50.19 74.37,45.11 74.37,44.5 C6.2 74.37,44.4 74.37,40.13 80.77,33.73 R18.2 80.67,33.63 86.26,33.63 88.49,31.39 U2.TER 88.59,31.29 88.59,26.52 | 88.59,26.52 88.59,25.09 U2.2 | 88.59,26.52 85.45,26.52 85.24,26.31 85.24,23.98 81.69,20.42 81.69,19.51 C14.2 81.69,19.41 78.94,19.41 77.72,20.62 U4.5 77.32,20.73 v73.86,20.73 | C1.2 48.87,45.62 48.87,46.53 47.65,47.75 47.65,51.1 C8.2 47.65,51.21 48.67,52.22 48.67,57 | 48.67,61.57 45.41,61.57 44.15,60.3 | 48.67,61.57 49.38,61.57 C34.1 | 44.15,60.3 43.38,59.54 43.38,58.73 U$2.20 | 48.67,61.57 48.67,57 | TP13.TP 58.22,38.41 | 58.22,38.41 61.06,41.25 61.06,42.67 U1.12 61.06,42.77 61.06,50.49 54.56,57 48.67,57 | 58.22,38.41 60.45,36.17 C3.2 60.55,36.17 63.09,36.17 C2.2 63.2,36.07 63.2,21.54 C13.1 63.8,21.44 59.84,21.44 59.74,21.54 U3.5 59.64,21.64 59.33,21.64 55.27,25.7 J4.16 J4.1 | v35.87,17.68 32.82,17.68 C4.2 | v38.71,20.52 40.13,20.52 C17.2 | 44.15,60.3 v42.88,61.57
  Bottom 0.254: v15.75,59.64 18.9,59.64 v20.83,61.57 v42.88,61.57 | v35.87,17.68 v38.71,20.52 45.41,20.52 55.27,30.38 J4.16 55.37,30.38 63.3,30.38 72.95,20.73 v73.86,20.73